# Altium PCB PCB2_mouv_version_2.PcbDoc
Units mm, origin at the board's own origin, x right, y up, seen from the top; angles counter-clockwise.
Board outline 60 x 60 mm, 2 copper layers (Top Layer, Bottom Layer); 7 components, 8 nets, 47 pads, 4 vias.
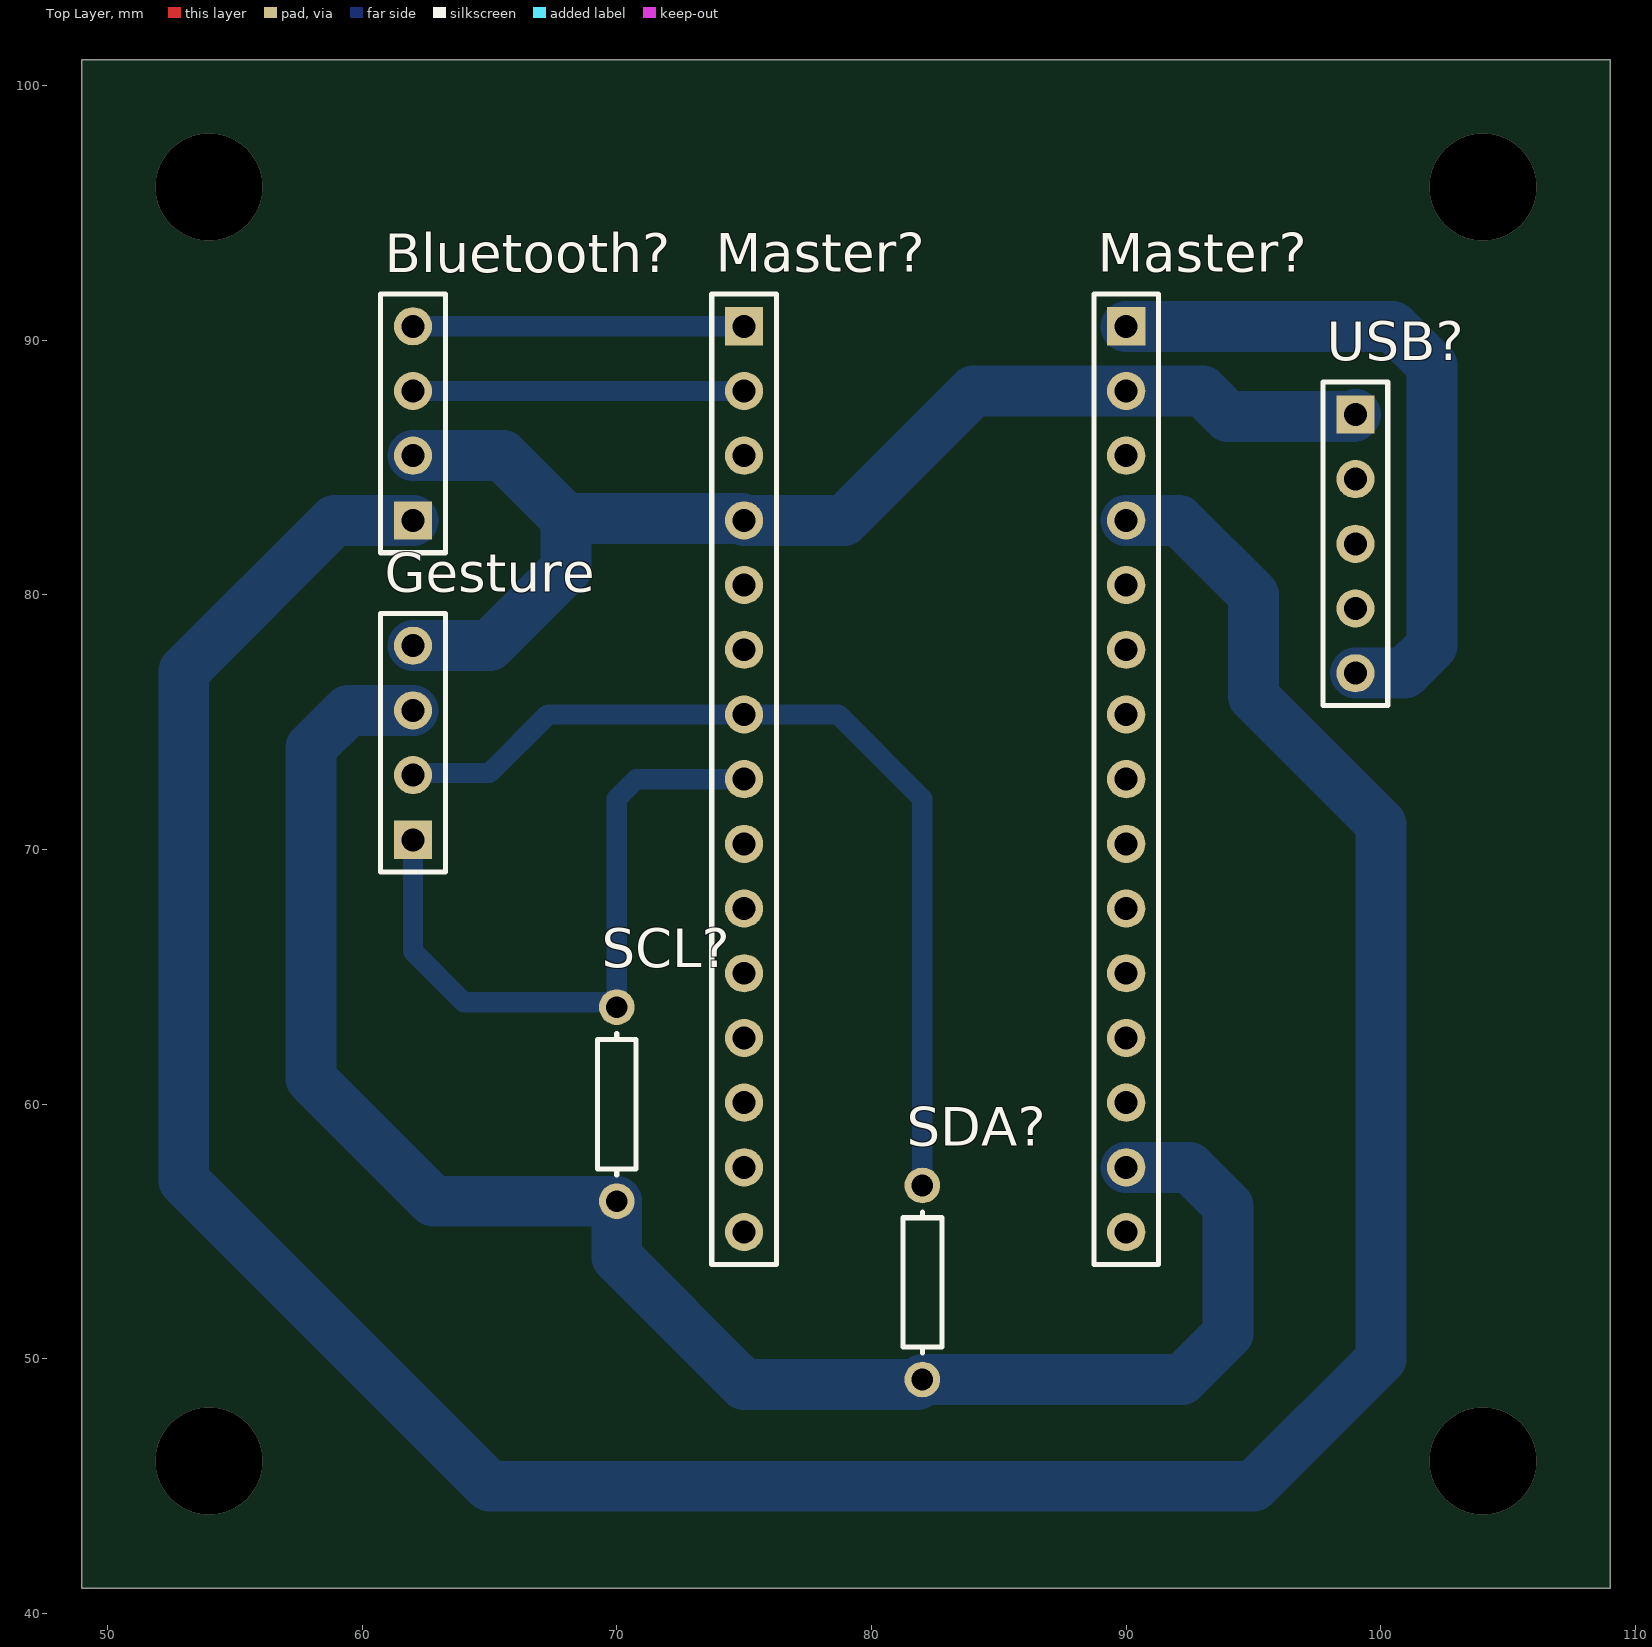
[diagram p0: Top Layer view]
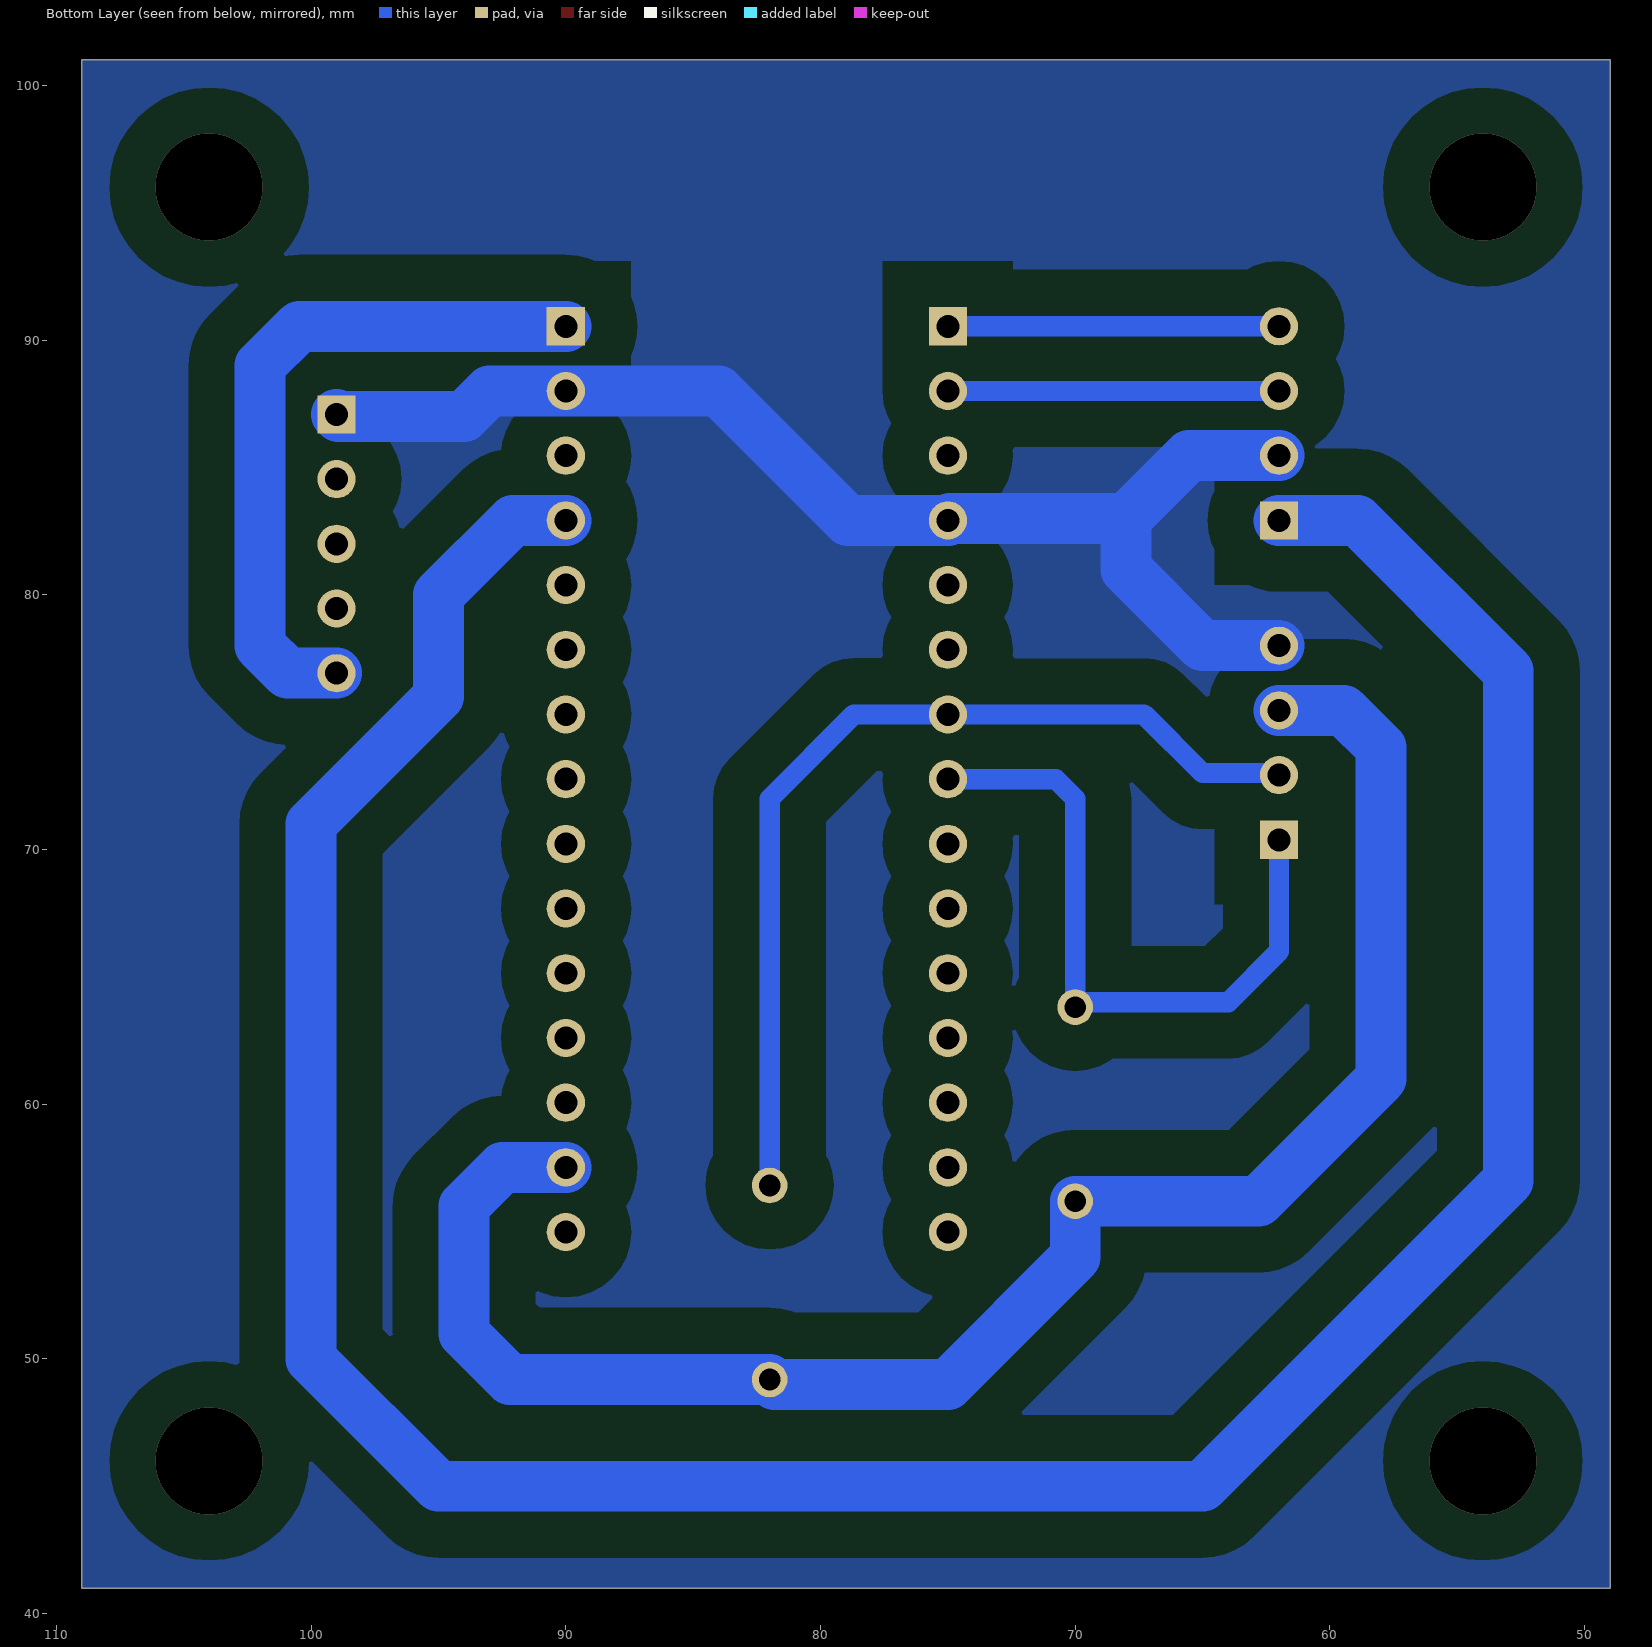
[diagram p1: Bottom Layer view, seen from below]

## Layer stack, top to bottom
Top Solder: solder mask 0.0102, Solder Resist, Dk 3.5
Top Layer: signal copper 0.0356
Dielectric 1: dielectric 0.32, FR-4, Dk 4.8
Bottom Layer: signal copper 0.0356
Bottom Solder: solder mask 0.0102, Solder Resist, Dk 3.5

## Board outline
49,41 49,101 109,101 109,41

## Design rules (kind name [scope] priority, off if disabled: settings)
Clearance Keep_out [IsPad vs IsKeepOut or IsPad] p1: gap=0.05 ignorepadtopadclearanceinfootprint=FALSE
Clearance Isolation_piste [InPolygon] p2: gap=1.8 ignorepadtopadclearanceinfootprint=FALSE
PolygonConnect [All] p1: connectstyle=Relief reliefconductorwidth=0.254 reliefentries=4 polygonreliefangle="90 Angle" airgapwidth=0.254
RoutingLayers [All] p1: top layer_v5=FALSE bottom layer_v5=TRUE
RoutingVias [All] p1: holewidth=0.8 width=1.7 viastyle="Through Hole" minholewidth=0.8 minwidth=1.7 maxholewidth=0.8 maxwidth=1.7
SolderMaskExpansion [All] p1: expansion=0.102
Width piste_puissance [InNet('+3V3')or InNet('+5V') or InNet('GND') or InNet('VIN')] p1: maxlimit=2 minlimit=1 preferedwidth=2
Width piste_normal [All] p2: maxlimit=1 minlimit=0.5 preferedwidth=0.8
29 further rules are at their usual default settings.

## Classes and differential pairs
component class shematic_carte_mouv: Bluetooth? Gesture Master? SCL? SDA? USB?

## Components (designator, comment, footprint, x,y, rotation, side; value= is the part's Value field where it differs from the comment)
Bluetooth? "Bluetooth" HDR1X4 62,82.92 r90 top
Gesture "Gesture" HDR1X4 62,70.38 r90 top
Master? "Master" HDR1X15 75,90.54 r270 top
Master? "Master" HDR1X15 90,90.54 r270 top
SCL? "Res1" AXIAL-0.3 70,60 r90 top value=2K
SDA? "Res1" AXIAL-0.3 82,53 r90 top value=2K
USB? "Header 5" HDR1X5 99,87.08 r270 top

## Footprints (in the part's own frame and the unit in brackets; to place one, negate y for a bottom-side part, rotate by r counter-clockwise, add the part's x,y. Pads: shape width x height; smd on the part's side, far side on the other; paste and mask are expansions set on the pad)
AXIAL-0.3 [mm] "Axial Device, Thru-Hole; 2 Leads; 0.3 in Pin Spacing"
  round 1.4 hole 0.85: 1(-3.81,0) 2(3.81,0)
  silkscreen extent -2.77,-0.76 2.77,0.76
HDR1X4 [mm] "Connector; Header; 4 Position"
  rect 1.5x1.5 hole 0.9: 1(0,0)
  round 1.5 hole 0.9: 2(2.54,0) 3(5.08,0) 4(7.62,0)
  silkscreen extent -1.27,-1.27 8.89,1.27
HDR1X5 [mm] "Connector; Header; 5 Position"
  rect 1.5x1.5 hole 0.9: 1(0,0)
  round 1.5 hole 0.9: 2(2.54,0) 3(5.08,0) 4(7.62,0) 5(10.16,0)
  silkscreen extent -1.27,-1.27 11.43,1.27
HDR1X15 [mm] "Connector; Header; 15 Position"
  rect 1.5x1.5 hole 0.9: 1(0,0)
  round 1.5 hole 0.9: 2(2.54,0) 3(5.08,0) 4(7.62,0) 5(10.16,0) 6(12.7,0) 7(15.24,0) 8(17.78,0) 9(20.32,0) 10(22.86,0) 11(25.4,0) 12(27.94,0) 13(30.48,0) 14(33.02,0) 15(35.56,0)
  silkscreen extent -1.27,-1.27 36.83,1.27

## Part data
Bluetooth? Gesture: library part "Header 4", "Header, 4-Pin", LatestRevisionDate=17-Jul-2002, LatestRevisionNote="Re-released for DXP Platform.", Publisher="Altium Limited"
Master? Master?: library part "Header 15", "Header, 15-Pin", LatestRevisionDate=17-Jul-2002, LatestRevisionNote="Re-released for DXP Platform.", Publisher="Altium Limited"
SCL? SDA?: "Resistor", LatestRevisionDate=17-Jul-2002, LatestRevisionNote="Re-released for DXP Platform.", PackageDescription="Axial Device, Thru-Hole; 2 Leads; 0.3 in Pin Spacing", PackageReference=AXIAL-0.3, Published=8-Jun-2000, Publisher="Altium Limited"
USB?: "Header, 5-Pin", LatestRevisionDate=17-Jul-2002, LatestRevisionNote="Re-released for DXP Platform.", Publisher="Altium Limited"

## Via types
v1: diameter 4.2, hole 4.2, Top Layer to Bottom Layer, 4 vias

## Nets (pads, with @x,y where several pads share a name; then routed paths per layer and width w, separated by ;. In a path a pad name is that pad's centre, name@x,y a point inside that pad or via, vN(x,y) a via of type N, cw(c..) or ccw(c..) an arc to the next point about the centre after c; other vN are vias at no path point)
+3V3: Gesture.3 Master?.14@90,57.52 SCL?.1 SDA?.1 | length 70.3
  Bottom Layer w2: Gesture.3 59.46,75.46 58,74 58,61 62.81,56.19 SCL?.1 70,54 75,49 81.81,49 SDA?.1 92.19,49.19 94,51 94,56 92.48,57.52 Master?.14@90,57.52
+5V: Bluetooth?.1 Master?.4@90,82.92 | length 123.8
  Bottom Layer w2: Bluetooth?.1 58.92,82.92 53,77 53,57 65,45 95,45 100,50 100,71 95,76 95,80 92.08,82.92 Master?.4@90,82.92
D4: Gesture.2 Master?.7@75,75.3 SDA?.2 | length 37.5
  Bottom Layer w0.8: Gesture.2 62.08,73 65,73 67.3,75.3 75,75.3 78.7,75.3 82,72 SDA?.2
D5: Gesture.1 Master?.8@75,72.76 SCL?.2 | length 26.8
  Bottom Layer w0.8: Gesture.1 62,66 64,64 69.81,64 SCL?.2 70,72 70.76,72.76 Master?.8@75,72.76
GND: Bluetooth?.2 Gesture.4 Master?.2@90,88 Master?.4@75,82.92 USB?.1 | length 49.8
  Bottom Layer w2: Gesture.4 65,78 68,81 68,83 ; Bluetooth?.2 65.54,85.46 68,83 ; USB?.1 98.92,87 94,87 93,88 90,88 84,88 78.92,82.92 75,82.92 74.92,83 68,83
RXBT: Bluetooth?.4 Master?.1@75,90.54 | length 13
  Bottom Layer w0.8: Bluetooth?.4 Master?.1@75,90.54
TXBT: Bluetooth?.3 Master?.2@75,88 | length 13
  Bottom Layer w0.8: Bluetooth?.3 Master?.2@75,88
VIN: Master?.1@90,90.54 USB?.5 | length 27.1
  Bottom Layer w2: Master?.1@90,90.54 100.46,90.54 102,89 102,78 100.92,76.92 USB?.5
pads on no net: Master?.3 Master?.5 Master?.6 Master?.7@90,75.3 Master?.8@90,72.76 Master?.9 Master?.10 Master?.11 Master?.12 Master?.13 Master?.14@75,57.52 Master?.15 USB?.2 USB?.3 USB?.4
copper on no net:
  other v1: 54,46 104,46 54,96 104,96

## Polygon pours and split planes (outlines as drawn)
GND on Bottom Layer "plan_de_masse" (solid, pour order 0): 49,41 49,101 109,101 109,41

## Silkscreen, mask and mechanical layers (free items; w line width, h text height)
Mechanical 1:
  the board outline again, w0.254

## Dimensions
109,101 to 109,41 on Top Paste
109,101 to 49,101 on Top Paste
75,90.54 to 90,90.54 on Top Paste